# Altium PCB PCB1.PcbDoc
Units mm, origin at the board's own origin, x right, y up, seen from the top; angles counter-clockwise.
Board outline 42.8 x 28.96 mm, 2 copper layers (Top Layer, Bottom Layer); 61 components, 68 nets, 230 pads, 35 vias.
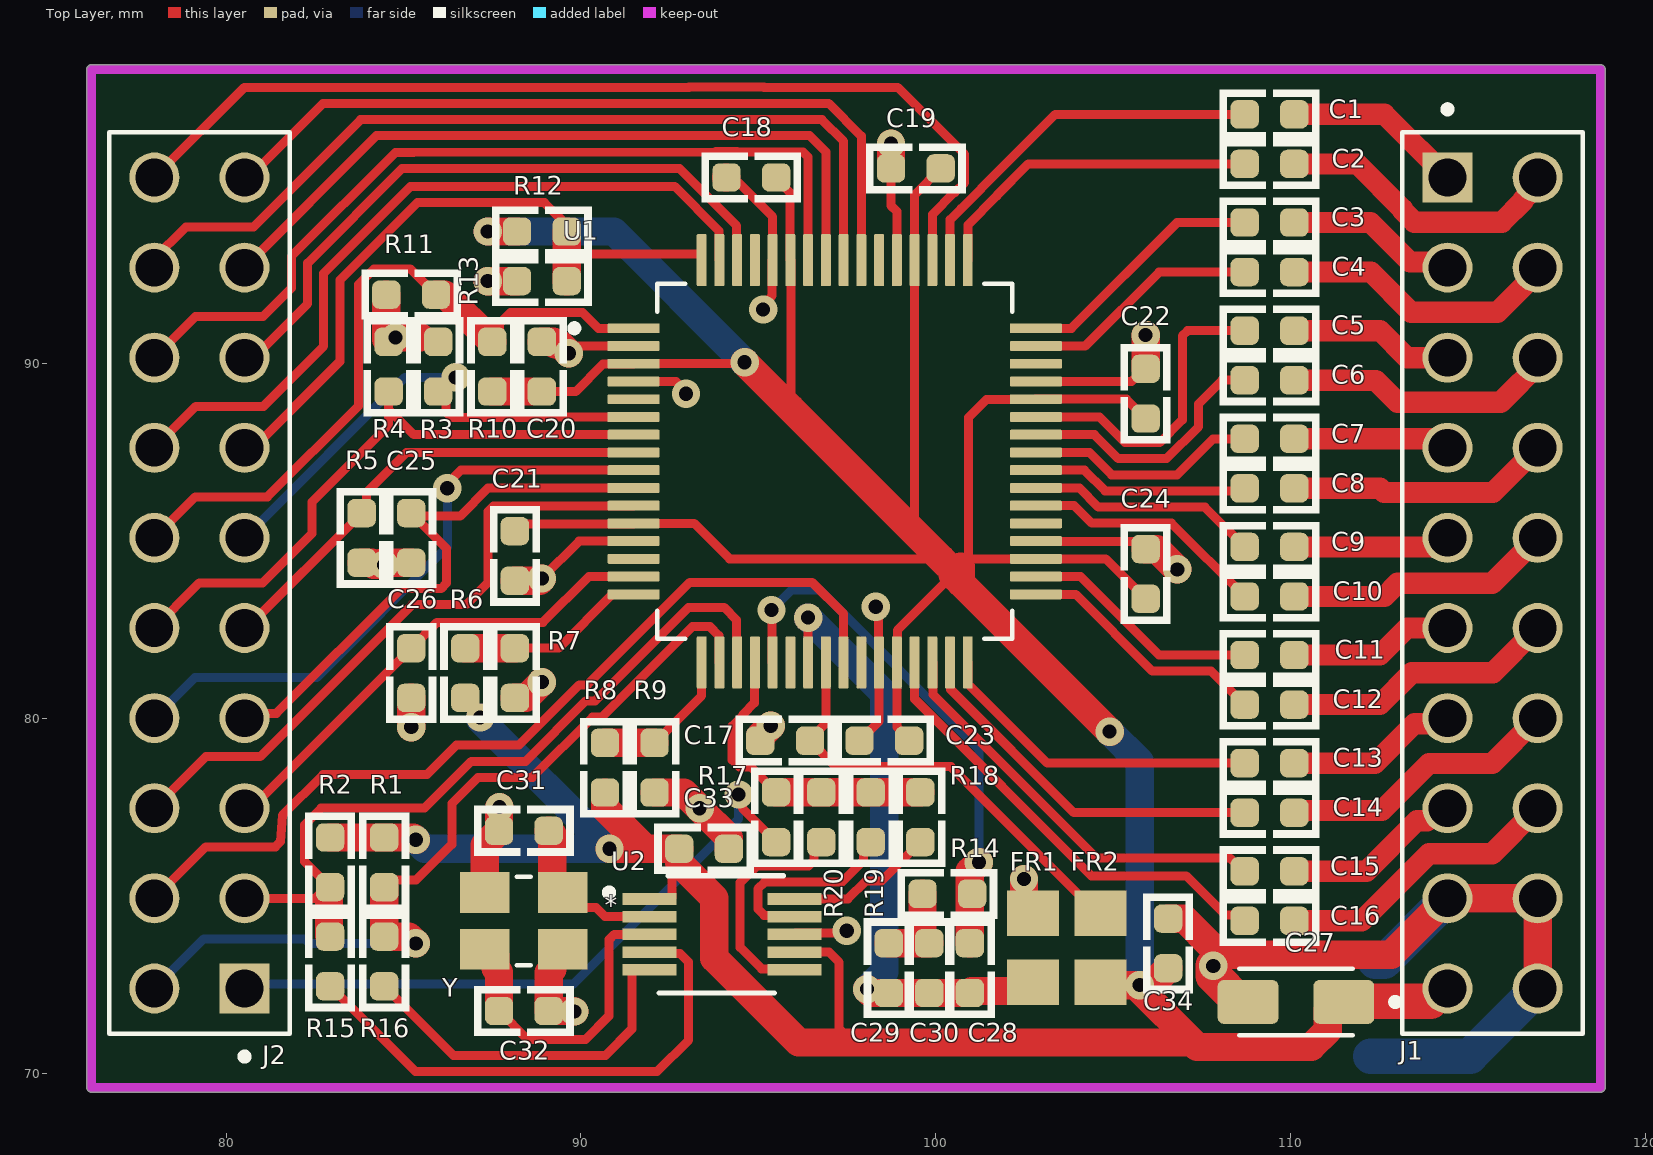
[diagram p0: Top Layer view]
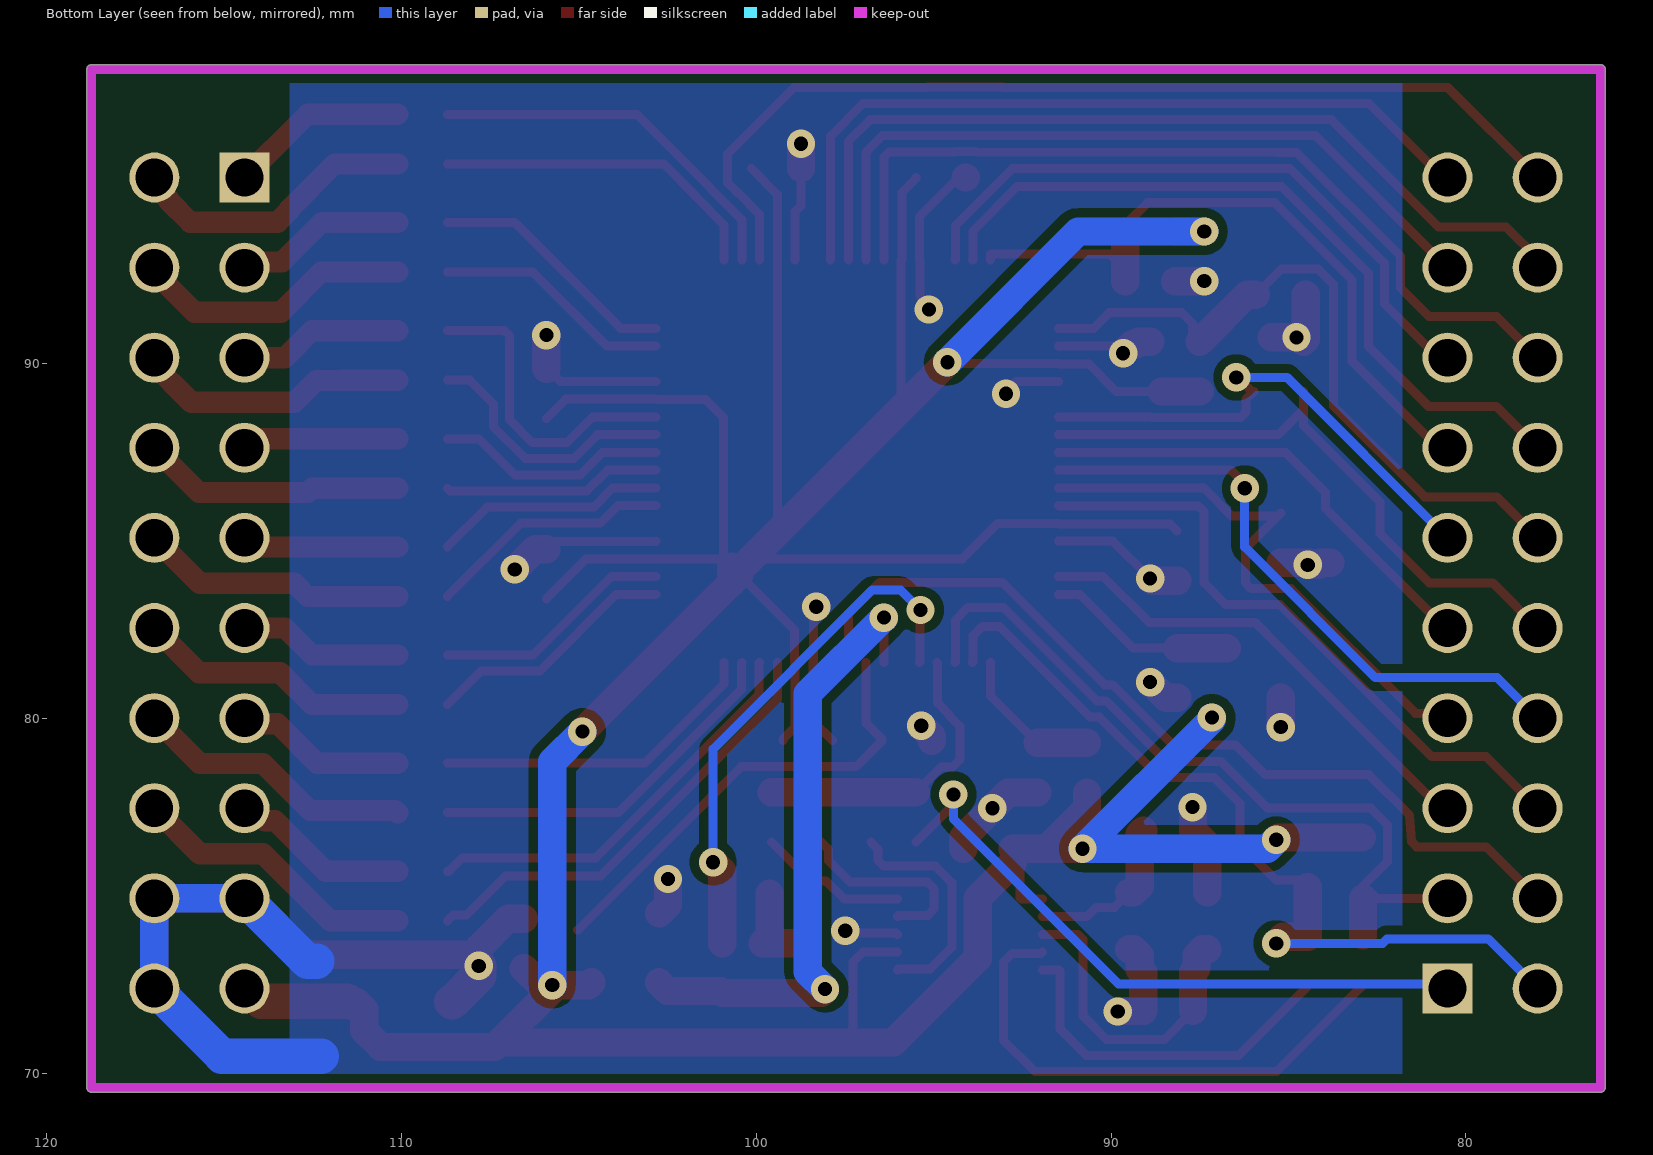
[diagram p1: Bottom Layer view, seen from below]
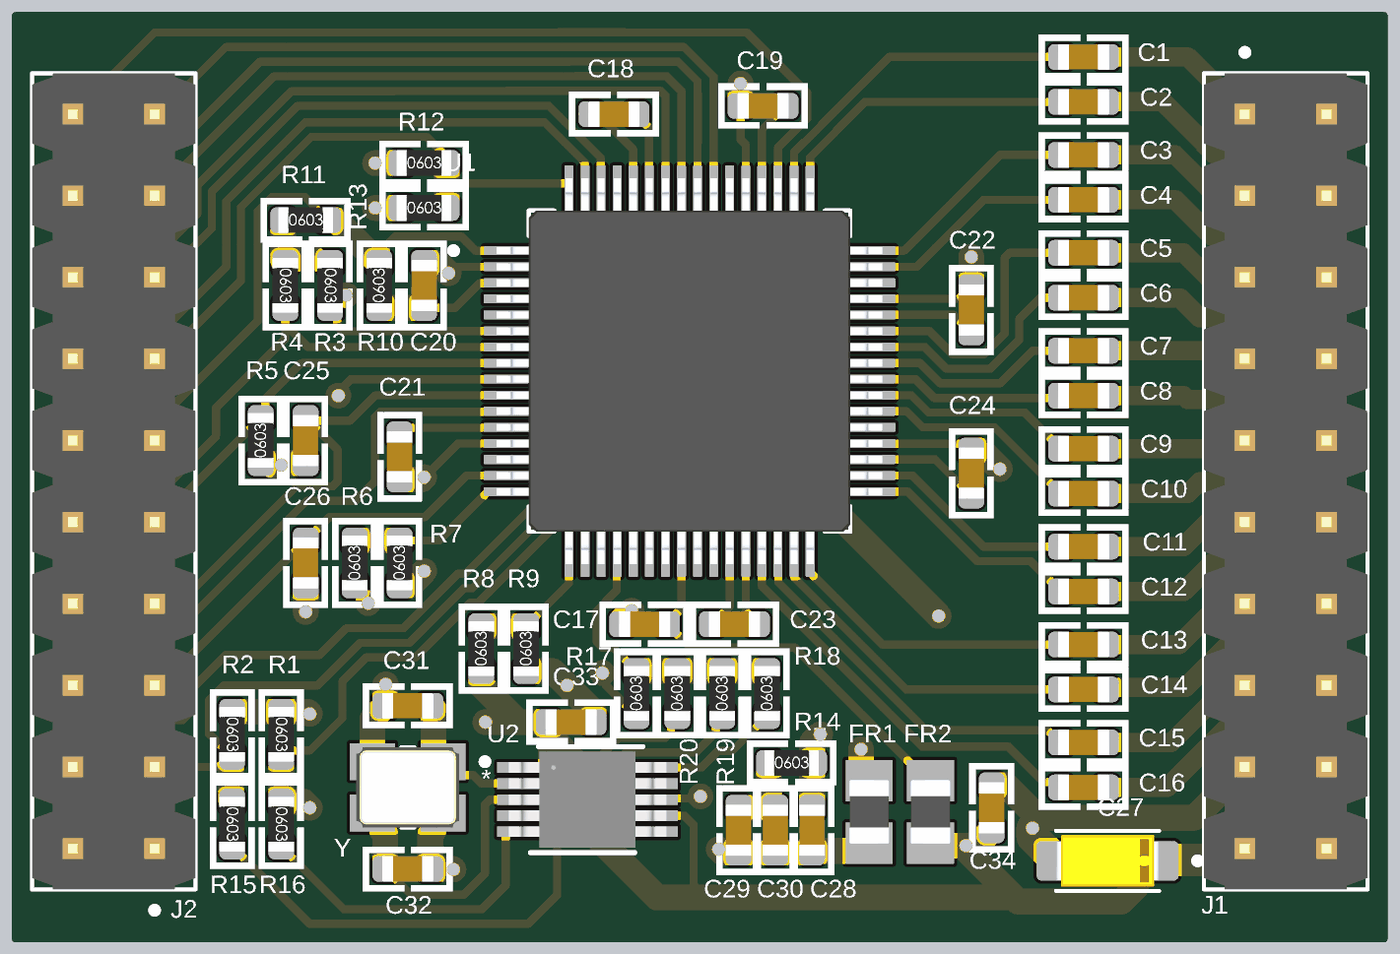
[diagram p2: 3D render of the assembled board from above, using the file's embedded part models]

## Layer stack, top to bottom
Top Solder: solder mask 0.0102, Solder Resist, Dk 3.5
Top Layer: signal copper 0.0356
Dielectric 1: dielectric 0.32, FR-4, Dk 4.8
Bottom Layer: signal copper 0.0356
Bottom Solder: solder mask 0.0102, Solder Resist, Dk 3.5

## Board outline
76.073,69.596 ccw(c76.2,69.596) 76.2,69.469 118.745,69.469 ccw(c118.745,69.596) 118.872,69.596 118.872,98.298 ccw(c118.745,98.298) 118.745,98.425 76.2,98.425 ccw(c76.2,98.298) 76.073,98.298

## Design rules (kind name [scope] priority, off if disabled: settings)
Clearance [All] p1: gap=0.254 ignorepadtopadclearanceinfootprint=FALSE except(0: Arc-Hole Track-Hole SMDPad-Hole THPad-Hole Via-Hole Fill-Hole Poly-Hole Region-Hole Text-Hole; 0.15: Arc-SMDPad Track-SMDPad SMDPad-SMDPad; 0.2: Arc-Arc Arc-Track Track-Track)
PolygonConnect [All] p1: connectstyle=Relief reliefconductorwidth=0.254 reliefentries=4 polygonreliefangle="90 Angle" airgapwidth=0.254
RoutingVias [All] p1: holewidth=0.711 width=1.27 viastyle="Through Hole" minholewidth=0.711 minwidth=1.27 maxholewidth=0.711 maxwidth=1.27
SolderMaskExpansion [All] p1: expansion=0.102 istentingtop=FALSE
Width [All] p1: maxlimit=1 minlimit=0.254 preferedwidth=0.6
30 further rules are at their usual default settings.

## Components (designator, comment, footprint, x,y, rotation, side; value= is the part's Value field where it differs from the comment)
C1 "100nF" C0603 109.409,97.028 r0 top
C2 "100nF" C0603 109.409,95.631 r0 top
C3 "100nF" C0603 109.409,93.98 r0 top
C4 "100nF" C0603 109.409,92.583 r0 top
C5 "100nF" C0603 109.409,90.932 r0 top
C6 "100nF" C0603 109.409,89.535 r0 top
C7 "100nF" C0603 109.409,87.884 r0 top
C8 "100nF" C0603 109.409,86.487 r0 top
C9 "100nF" C0603 109.409,84.836 r0 top
C10 "100nF" C0603 109.409,83.439 r0 top
C11 "100nF" C0603 109.409,81.788 r0 top
C12 "100nF" C0603 109.409,80.391 r0 top
C13 "100nF" C0603 109.409,78.74 r0 top
C14 "100nF" C0603 109.409,77.343 r0 top
C15 "100nF" C0603 109.409,75.692 r0 top
C16 "100nF" C0603 109.409,74.295 r0 top
C17 "100nF" C0603 95.758,79.375 r0 top
C18 "100nF" C0603 94.804,95.25 r0 top
C19 "100nF" C0603 99.441,95.504 r0 top
C20 "100nF" C0603 88.9,89.916 r270 top
C21 "100nF" C0603 88.138,84.582 r90 top
C22 "100nF" C0603 105.918,89.154 r270 top
C23 "100nF" C0603 98.552,79.375 r0 top
C24 "100nF" C0603 105.918,84.074 r270 top
C25 "47pF" C0603 85.217,85.09 r270 top
C26 "1nF" C0603 85.217,81.28 r270 top
C27 "2.2uF" CAPMP3216X180N 110.156,72.009 r180 top
C28 "100nF" C0603 100.965,72.963 r270 top
C29 "100nF" C0603 98.679,72.963 r270 top
C30 "100nF" C0603 99.822,72.963 r270 top
C31 "12pF" C0603 88.392,76.835 r180 top
C32 "12pF" C0603 88.392,71.755 r0 top
C33 "470nF" C0603 93.472,76.327 r180 top
C34 "470nF" C0603 106.553,73.66 r270 top
FR1 "MI0805K400R-10" FB_MI0805K400R-10 102.743,73.533 r270 top
FR2 "MI0805K400R-10" FB_MI0805K400R-10 104.648,73.533 r90 top
J1 "VMHD-2x10-150-095-030" VALCON_VMHD-2x10-150-095-030 115.697,83.82 r270 top
J2 "VMHD-2x10-150-095-030" VALCON_VMHD-2x10-150-095-030 79.248,83.82 r90 top
R1 "4.7K" R0603 84.455,75.946 r270 top
R2 "4.7K" R0603 82.931,75.946 r270 top
R3 "0R" R0603 85.979,89.916 r270 top
R4 "0R" R0603 84.582,89.916 r270 top
R5 "0R" R0603 83.82,85.09 r90 top
R6 "0R" R0603 86.741,81.28 r90 top
R7 "0R" R0603 88.138,81.28 r90 top
R8 "0R" R0603 90.678,78.613 r90 top
R9 "0R" R0603 92.075,78.613 r90 top
R10 "0R" R0603 87.503,89.916 r90 top
R11 "0R" R0603 85.217,91.948 r0 top
R12 "0R" R0603 88.9,93.726 r0 top
R13 "0R" R0603 88.9,92.329 r0 top
R14 "3.4K" R0603 100.33,75.057 r0 top
R15 "0R" R0603 82.931,73.152 r270 top
R16 "0R" R0603 84.455,73.152 r270 top
R17 "0R" R0603 95.504,77.216 r90 top
R18 "0R" R0603 99.568,77.216 r90 top
R19 "0R" R0603 98.171,77.216 r90 top
R20 "0R" R0603 96.774,77.216 r90 top
U1 "sta309a" QFP50P1200X1200X120-64N 97.155,87.249 r0 top
U2 "SI5351A-B-GT" 10MSOP_3X3_SIL 93.98,73.914 r0 top
Y "X322527MOB4SI" XTAL_TSX-3225_16.0000MF18X-AC3 88.392,74.295 r180 top

## Footprints (in the part's own frame and the unit in brackets; to place one, negate y for a bottom-side part, rotate by r counter-clockwise, add the part's x,y. Pads: shape width x height; smd on the part's side, far side on the other; paste and mask are expansions set on the pad)
10MSOP_3X3_SIL [mil]
  rect 60x13 smd paste+0: 1(-80.5,39.37) 2(-80.5,19.68) 3(-80.5,0) 4(-80.5,-19.68) 5(-80.5,-39.37) 6(80.5,-39.37) 7(80.5,-19.68) 8(80.5,0) 9(80.5,19.68) 10(80.5,39.37)
  silkscreen extent -70,-65 68,65, body extent -96,-59 96,59, height 43
C0603 [mm]
  rrect50% 0.8x0.8 smd mask+0.075: 1(-0.7,0) 2(0.7,0)
  silkscreen extent -1.4,-0.7 1.4,0.7, body extent -0.8,-0.4 0.8,0.4, height 0.9
CAPMP3216X180N [mm]
  rrect25% 1.71x1.23 smd: 1(-1.35,0) 2(1.35,0)
  silkscreen extent -2.9,-0.93 1.6,0.93, body extent -1.6,-0.8 1.6,0.8, height 1.8
FB_MI0805K400R-10 [mm]
  rect 1.285x1.47 smd: 1(-0.973,0) 2(0.973,0)
  body extent -1,-0.63 1,0.63, height 1.1
QFP50P1200X1200X120-64N [mm]
  rrect25% 1.47x0.28 smd: 1(-5.67,3.75) 2(-5.67,3.25) 3(-5.67,2.75) 4(-5.67,2.25) 5(-5.67,1.75) 6(-5.67,1.25) 7(-5.67,0.75) 8(-5.67,0.25) 9(-5.67,-0.25) 10(-5.67,-0.75) 11(-5.67,-1.25) 12(-5.67,-1.75) 13(-5.67,-2.25) 14(-5.67,-2.75) 15(-5.67,-3.25) 16(-5.67,-3.75) 33(5.67,-3.75) 34(5.67,-3.25) 35(5.67,-2.75) 36(5.67,-2.25) 37(5.67,-1.75) 38(5.67,-1.25) 39(5.67,-0.75) 40(5.67,-0.25) 41(5.67,0.25) 42(5.67,0.75) 43(5.67,1.25) 44(5.67,1.75) 45(5.67,2.25) 46(5.67,2.75) 47(5.67,3.25) 48(5.67,3.75)
  rrect25% 0.28x1.47 smd: 17(-3.75,-5.67) 18(-3.25,-5.67) 19(-2.75,-5.67) 20(-2.25,-5.67) 21(-1.75,-5.67) 22(-1.25,-5.67) 23(-0.75,-5.67) 24(-0.25,-5.67) 25(0.25,-5.67) 26(0.75,-5.67) 27(1.25,-5.67) 28(1.75,-5.67) 29(2.25,-5.67) 30(2.75,-5.67) 31(3.25,-5.67) 32(3.75,-5.67) 49(3.75,5.67) 50(3.25,5.67) 51(2.75,5.67) 52(2.25,5.67) 53(1.75,5.67) 54(1.25,5.67) 55(0.75,5.67) 56(0.25,5.67) 57(-0.25,5.67) 58(-0.75,5.67) 59(-1.25,5.67) 60(-1.75,5.67) 61(-2.25,5.67) 62(-2.75,5.67) 63(-3.25,5.67) 64(-3.75,5.67)
  silkscreen extent -7.44,-5 5,5, body extent -6,-6 6,6, height 1.19
R0603 [mm]
  rrect50% 0.8x0.8 smd mask+0.075: 1(-0.7,0) 2(0.7,0)
  silkscreen extent -1.4,-0.7 1.4,0.7, body extent -0.85,-0.4 0.85,0.4, height 0.56
VALCON_VMHD-2x10-150-095-030 [mm]
  rect 1.41x1.41 hole 1.06: 01(-11.43,-1.27)
  round 1.41 hole 1.06: 02(-11.43,1.27) 03(-8.89,-1.27) 04(-8.89,1.27) 05(-6.35,-1.27) 06(-6.35,1.27) 07(-3.81,-1.27) 08(-3.81,1.27) 09(-1.27,-1.27) 10(-1.27,1.27) 11(1.27,-1.27) 12(1.27,1.27) 13(3.81,-1.27) 14(3.81,1.27) 15(6.35,-1.27) 16(6.35,1.27) 17(8.89,-1.27) 18(8.89,1.27) 19(11.43,-1.27) 20(11.43,1.27)
  silkscreen extent -13.45,-2.54 12.7,2.54, body extent -12.7,-2.54 12.7,2.54, height 12
XTAL_TSX-3225_16.0000MF18X-AC3 [mm]
  rect 1.4x1.15 smd: 1(-1.1,-0.8) 2(1.1,-0.8) 3(1.1,0.8) 4(-1.1,0.8)
  silkscreen extent -2.5,-1.25 0.2,1.25, body extent -1.6,-1.25 1.6,1.25, height 0.6

## Part data
C1 C2 C3 C4 C5 C6 C7 C8 C9 C10 C11 C12 C13 C14 C15 C16 C17 C18 C19 C20 C21 C22 C23 C24 C25 C26 C28 C29 C30 C31 C32 C33 C34: library part CAP_SMD_MLCC_0603_1, "CAP, MLCC", ASSEMBLY=ASSEMBLY, MANF=-, MANF_P#=MANF_PART#, PARAM="-, -%", PARAM2=-V, Price="100= 1$"
C27: library part T491A475K010AT, "Capacitors Tantalum PCB 4.7uF SMD Tol 10% 10 VDC Case Size 3216 T491 Series", Package="SMD-2 KEMET", Check_prices=https://www.snapeda.com/parts/T491A475K010AT/KEMET/view-part/?ref=eda, MF=KEMET, MP=T491A475K010AT, SnapEDA_Link=https://www.snapeda.com/parts/T491A475K010AT/KEMET/view-part/?ref=snap
FR1 FR2: "40 Ohms @ 100MHz 1 Power Line Ferrite Bead 0805 (2012 Metric) 1.5A 50mOhm", Package="0805 Laird-Signal Integrity Products", Availability=Warning, Check_prices=https://www.snapeda.com/parts/MI0805K400R-10/Laird/view-part/4794545/?ref=eda, MF="Laird-Signal Integrity Products", MP=MI0805K400R-10, Price=None, Purchase-URL=https://pricing.snapeda.com/search/part/MI0805K400R-10/?ref=eda, SnapEDA_Link=https://www.snapeda.com/parts/MI0805K400R-10/Laird/view-part/4794545/?ref=snap
J1 J2: Package=None, Availability=Unavailable, MP=VMHD-2x10-150-095-030, Price=None
R1 R2 R3 R4 R5 R6 R7 R8 R9 R10 R11 R12 R13 R14 R15 R16 R17 R18 R19 R20: library part RES_SMD_0603_1, "RESISTOR, SMD", ASSEMBLY=ASSEMBLY, DESC=DESCRIPTION, DIST#=MOUSER, MANF=-, MANF_P#=-, PARAM="1%, 0.1W", PARAM2=-, Price=-
U2: "No Description Available", Manufacturer_Name="Silicon Labs", Copyright="Copyright (C) 2025 Ultra Librarian. All rights reserved.", Manufacturer_Part_Number=SI5351A-B-GT, RefDes=RefDes, Type=Type
Y: library part TSX-3225_16.0000MF18X-AC3, "16 MHz Â±10ppm Crystal 18pF 60 Ohms 4-SMD, No Lead", Package="SMD-4 EPSON", Check_prices=https://www.snapeda.com/parts/TSX-3225%2016.0000MF18X-AC3/EPSON/view-part/?ref=eda, MF=EPSON, MP="TSX-3225 16.0000MF18X-AC3", SnapEDA_Link=https://www.snapeda.com/parts/TSX-3225%2016.0000MF18X-AC3/EPSON/view-part/?ref=snap

## Via types
v1: diameter 0.8, hole 0.4, Top Layer to Bottom Layer, tented both sides, 35 vias

## Nets (pads, with @x,y where several pads share a name; then routed paths per layer and width w, separated by ;. In a path a pad name is that pad's centre, name@x,y a point inside that pad or via, vN(x,y) a via of type N, cw(c..) or ccw(c..) an arc to the next point about the centre after c; other vN are vias at no path point)
+3.3: C18.2 C19.2 C20.2 C21.2 C22.2 C23.2 C24.2 C27.1 C33.2 C34.2 FR2.1 J1.19 R1.1 R2.1 R6.1 R8.1 R10.1 R12.1 U1.3 U1.12 U1.28 U1.35 U1.44 U1.52 U1.59 U2.1 U2.7 | length 143.6
  Top Layer w0.254: C21.2 88.342,85.486 91.472,85.486 U1.12 93.19,85.499 94.19,84.499 100.159,84.499 ; C20.2@88.581,89.216 C20.2 89.851,89.216 90.621,89.986 91.472,89.986 U1.3 91.498,90.012 94.584,90.012 v1(94.615,90.043) ; U2.1 92.532,74.914 92.57,74.952 C33.2@92.57,76.125 ; C18.2 95.504,95.216 95.892,94.828 95.892,92.932 U1.59 95.918,92.906 95.918,88.74 ; U2.7 96.995,73.414 97.015,73.394 ; 97.016,73.394 97.282,73.128 97.282,71.247 97.663,70.866 ; C23.2 99.252,79.415 98.905,79.762 U1.28 98.918,81.592 98.918,82.485 100.482,84.049 100.545,84.113 100.694,84.262 ; 99.405,85.344 U1.52 99.405,94.768 C19.2 ; 100.711,84.279 100.931,84.499 ; C24.2 104.793,84.499 U1.35 100.931,84.499 ; C22.2 105.373,88.999 U1.44 102.812,88.986 101.432,88.986 100.931,88.485 100.931,84.499
  Top Layer w0.8: R2.1 R1.1 85.279,76.646 v1(85.344,76.581) ; v1(87.376,93.726) R12.1 ; R10.1 C20.2@88.581,89.216 ; R8.1 90.678,77.47 91.821,76.327 ; v1(90.805,76.327) 91.821,76.327 ; C33.2@92.772,75.929 93.761,74.94 93.761,73.246 96.141,70.866 97.663,70.866 107.25,70.866 ; C33.2 91.821,76.327 ; v1(94.615,90.043) 95.918,88.74 100.159,84.499 100.545,84.113 100.711,83.947 ; 100.482,84.049 100.711,83.82 ; 100.711,84.279 100.711,83.947 ; FR2.1 104.723,72.485 v1(105.752,72.485) ; v1(104.902,79.629) 100.711,83.82 ; C34.2 106.078,72.485 v1(105.752,72.485) ; C27.1 111.266,72.009 111.051,71.794 111.051,71.208 110.582,70.739 107.377,70.739 107.25,70.866 ; 100.711,83.82 100.711,83.947 ; v1(105.752,72.485) 105.752,72.364 107.25,70.866
  Top Layer w1: C27.1 111.532,72.035 113.961,72.035 114.316,72.39 J1.19
  Bottom Layer w0.8: v1(85.344,76.581) 85.598,76.327 v1(90.805,76.327) 87.159,79.973 v1(87.159,80.029) ; v1(87.376,93.726) 90.932,93.726 v1(94.615,90.043) ; v1(104.902,79.629) 105.752,78.779 v1(105.752,72.485)
\lrcko: J2.18 U1.56 | length 24.7
  Top Layer w0.254: J2.18@77.938,92.924 78.867,93.853 80.765,93.853 83.794,96.882 93.424,96.882 93.427,96.885 94.781,96.885 94.784,96.882 96.793,96.882 97.405,96.27 97.405,95.9 97.408,95.897 97.408,94.349 97.405,94.346 U1.56
bicki: J2.06 U1.11 | length 18.2
  Top Layer w0.254: J2.06 79.432,78.924 80.956,78.924 85.241,83.209 86.765,83.209 87.376,83.82 87.376,85.83 87.532,85.986 91.472,85.986 U1.11
bicko: J2.19 U1.55 | length 22.5
  Top Layer w0.254: J2.19@80.262,94.867 82.731,97.336 93.236,97.336 93.239,97.339 94.969,97.339 94.972,97.336 96.981,97.336 97.905,96.412 U1.55
bypass: R6.2 R7.2 U1.16 | length 5.4
  Top Layer w0.254: R7.2 89.371,81.98 90.89,83.499 U1.16
  Top Layer w0.8: R6.2 R7.2
ckout: J2.04 U1.25 | length 25.2
  Top Layer w0.254: J2.04 79.432,76.384 81.385,76.384 81.534,76.533 81.585,77.267 82.737,78.419 85.658,78.419 86.487,79.248 88.254,79.248 89.954,80.948 90.18,80.948 93.071,83.839 96.514,83.839 97.405,82.948 U1.25
eapd: J2.20 U1.51 | length 28
  Top Layer w0.254: J2.20 80.518,97.79 93.048,97.79 93.051,97.793 95.157,97.793 95.16,97.79 98.93,97.79 100.818,95.902 100.818,95.106 100.539,94.827 100.528,94.827 99.905,94.204 U1.51
filter: C28.1 R14.2 U1.21 | length 15
  Top Layer w0.254: v1(95.373,83.058) 95.392,83.039 95.392,81.592 U1.21
  Top Layer w0.8: C28.1 100.965,75.692 v1(101.219,75.946)
  Bottom Layer w0.254: v1(95.373,83.058) 95.94,83.625 96.728,83.625 101.219,79.134 v1(101.219,75.946)
gnd: C17.1 C18.1 C19.1 C20.1 C21.1 C22.1 C23.1 C24.1 C25.2 C26.2 C27.2 C31.2 C32.2 C33.1 C34.1 FR1.1 J1.17 J1.18 J1.20 R3.1 R4.1 R5.1 R7.1 R9.1 R11.1 R13.1 U1.2 U1.4 U1.13 U1.27 U1.36 U1.45 U1.53 U1.60 U2.8 Y.2 Y.4 | length 74.6
  Top Layer w0.254: v1(88.9,83.947) 89.952,84.999 U1.13 ; v1@89.504,90.499 U1.2 U1.2@91.472,90.486 ; U1.4 92.679,89.499 92.964,89.214 v1(92.964,89.154) ; C18.1@94.423,95.123 95.405,94.141 U1.60 95.392,92.906 95.392,91.919 95.137,91.664 v1(95.137,91.527) ; U2.8 96.063,73.952 97.432,73.952 v1(97.494,74.015) ; C23.1 98.405,79.928 U1.27 98.392,81.592 98.392,83.068 v1(98.309,83.151) ; C19.1 98.741,94.457 98.905,94.293 U1.53 ; U1.36 102.838,84.986 105.706,84.986 C24.1 ; U1.45 105.523,89.499 105.878,89.854 C22.1
  Top Layer w0.8: R5.1 84.101,84.39 84.163,84.328 v1(84.455,84.328) ; v1@84.393,84.39 C25.2 ; R11.1 84.517,90.681 R4.1 ; v1(84.772,90.743) 85.471,90.743 ; v1(85.217,79.756) C26.2 ; Y.2 87.292,76.435 C31.2 87.692,77.488 v1(87.705,77.502) ; v1(87.376,92.329) R13.1 ; R7.1 88.454,80.58 v1(88.9,81.026) ; C21.1 88.835,83.882 v1(88.9,83.947) ; C20.1 89.216,90.616 89.281,90.551 89.408,90.551 v1(89.662,90.297) ; Y.4 89.367,73.495 89.192,73.32 89.192,72.936 89.092,72.836 C32.2 89.795,71.755 v1(89.811,71.739) ; R9.1 92.902,77.913 v1(93.345,77.47) 93.345,77.466 94.172,76.639 C33.1 ; C18.1@94.101,95.247 C18.1 ; C17.1 95.058,79.501 v1(95.351,79.794) ; C19.1 v1(98.741,96.201) ; v1(102.489,75.476) 102.489,74.748 102.731,74.506 FR1.1 ; C24.1 106.234,84.774 v1(106.807,84.201) ; C22.1 v1(105.918,90.805) ; C34.1 106.996,74.36 107.823,73.533 ; v1(107.823,73.025) 108.143,73.345 112.842,73.345 J1.17 J1.18 J1.20
  Top Layer w1: v1(107.823,73.025) 107.823,72.752 108.566,72.009 C27.2@108.585,72.009
  Bottom Layer w0.8: J1.17 J1.18 J1.20
  Bottom Layer w1: 112.268,70.485 115.062,70.485 J1.20 ; 112.395,73.152 112.649,73.152 J1.17
gnda: C28.2 C29.2 C30.2 FR1.2 U1.23 | length 17.8
  Top Layer w0.254: U1.23 v1(96.405,82.844)
  Top Layer w0.8: v1(98.063,72.371) 98.171,72.263 C29.2 C30.2 C28.2 101.02,72.318 102.501,72.318 FR1.2
  Bottom Layer w0.254: v1(98.063,72.371) v1@98.063,72.519
  Bottom Layer w0.8: v1(96.405,82.844) 98.548,80.7 98.548,72.856 v1(98.063,72.371)
lrcki: C25.1 J2.07 U1.10 | length 16.2
  Top Layer w0.254: J2.07 80.651,80.143 81.413,80.143 84.933,83.663 86.061,83.663 86.21,83.812 86.21,84.797 C25.1@85.301,85.706 ; C25.1 C25.1@85.301,85.706 ; U1.10 87.388,86.499 86.595,85.706 C25.1@85.301,85.706
mvo: J2.12 R10.2 R11.2 U1.1 | length 20.3
  Top Layer w0.254: J2.12@77.795,84.907 79.134,86.246 81.166,86.246 83.725,88.805 83.725,92.231 84.169,92.675 85.19,92.675 85.723,92.142 R11.2@85.817,92.142 ; R10.2 87.702,90.815 87.702,91.131 88.011,91.44 90.05,91.44 90.491,90.999 U1.1
  Top Layer w0.8: R11.2 86.171,91.948 R10.2
NetC29_1: C29.1 C30.1 R14.1 | length 2.6
  Top Layer w0.8: C29.1 C30.1 99.63,73.855 R14.1
NetC31_1: C31.1 U2.2 Y.1 | length 4.7
  Top Layer w0.254: Y.1 89.911,74.676 90.424,74.676 90.686,74.414 U2.2
  Top Layer w0.8: C31.1 89.192,76.735 89.192,75.27 89.367,75.095 Y.1
NetC32_1: C32.1 U2.3 Y.3 | length 9
  Top Layer w0.254: C32.1 88.489,70.958 90.135,70.958 90.792,71.615 90.792,73.765 90.941,73.914 U2.3
  Top Layer w0.8: Y.3 87.417,73.495 87.592,73.32 87.592,72.951 87.692,72.851 C32.1
NetR15_2: R15.2 U2.4 | length 14.9
  Top Layer w0.254: R15.2 85.333,70.05 92.148,70.05 93.034,70.936 93.034,73.134 92.792,73.376 91.973,73.376 U2.4
NetR16_2: R16.2 U2.5 | length 10.2
  Top Layer w0.254: R16.2@84.486,72.421 86.403,70.504 90.697,70.504 91.44,71.247 91.44,72.876 91.478,72.914 U2.5
NetR18_1: R18.1 U2.10 | length 4.2
  Top Layer w0.254: U2.10 97.527,74.914 98.039,75.426 98.478,75.426 R18.1
NetR19_1: R19.1 U2.9 | length 5.6
  Top Layer w0.254: U2.9 95.987,74.452 95.168,74.452 94.986,74.634 94.986,75.194 95.177,75.385 97.356,75.385 97.972,76.001 97.972,76.317 R19.1
NetR20_1: R20.1 U2.6 | length 6.6
  Top Layer w0.254: U2.6 95.998,72.941 95.094,72.941 94.488,73.547 94.488,75.373 94.954,75.839 96.413,75.839 96.575,76.001 96.575,76.317 R20.1
out1a: C1.1 U1.50 | length 10.7
  Top Layer w0.254: U1.50 100.405,94.062 100.716,94.373 100.727,94.373 101.272,94.918 101.272,94.929 103.371,97.028 C1.1
out1a1: C1.2 J1.01 | length 5.3
  Top Layer w0.6: C1.2 112.649,97.028 J1.01@114.593,95.084
out1b: C2.1 U1.49 | length 9.5
  Top Layer w0.254: U1.49 100.905,93.909 101.726,94.73 101.726,94.741 102.616,95.631 C2.1
out1b1: C2.2 J1.02 | length 8.4
  Top Layer w0.6: C2.2 111.887,95.631 113.168,94.35 113.168,94.316 113.493,93.991 115.962,93.991 116.562,94.591 116.562,94.626 117.21,95.274 J1.02@117.245,95.274
out2a: C3.1 U1.48 | length 7.1
  Top Layer w0.254: U1.48 103.826,90.999 106.807,93.98 C3.1
out2a1: C3.2 J1.03 | length 4.8
  Top Layer w0.6: C3.2 112.256,93.98 113.371,92.865 114.272,92.865 J1.03
out2b: C4.1 U1.47 | length 6.7
  Top Layer w0.254: U1.47 104.215,90.499 106.299,92.583 C4.1
out2b1: C4.2 J1.04 | length 7.9
  Top Layer w0.6: C4.2 112.268,92.583 113.4,91.451 115.835,91.451 J1.04@117.017,92.633
out3a: C5.1 U1.43 | length 8.9
  Top Layer w0.254: U1.43 104.616,88.499 105.338,87.777 106.316,87.777 106.956,88.417 106.956,90.783 107.105,90.932 C5.1
out3a1: C5.2 J1.05 | length 4.6
  Top Layer w0.6: C5.2 112.522,90.932 113.284,90.17 J1.05
out3b: C6.1 U1.42 | length 7.5
  Top Layer w0.254: U1.42 104.474,87.999 105.15,87.323 106.504,87.323 107.41,88.229 107.41,88.868 108.077,89.535 C6.1
out3b1: C6.2 J1.06 | length 7.7
  Top Layer w0.6: C6.2 111.682,89.535 111.692,89.525 112.405,89.525 113.019,88.911 115.927,88.911 J1.06@117.075,90.059
out4a: C7.1 U1.41 | length 6.6
  Top Layer w0.254: U1.41 104.332,87.499 104.962,86.869 106.808,86.869 107.823,87.884 C7.1
out4a1: C7.2 J1.07 | length 4.4
  Top Layer w0.6: C7.2 113.954,87.884 114.208,87.63 J1.07
out4b: C8.1 U1.40 | length 6.2
  Top Layer w0.254: U1.40 104.19,86.999 104.774,86.415 108.637,86.415 C8.1
out4b1: C8.2 J1.08 | length 7.8
  Top Layer w0.6: C8.2 112.522,86.487 112.638,86.371 115.708,86.371 J1.08@117.204,87.867
out5a: C9.1 U1.39 | length 6.6
  Top Layer w0.254: U1.39 104.048,86.499 104.588,85.959 107.586,85.959 C9.1
out5a1: C9.2 J1.09 | length 4.4
  Top Layer w0.6: C9.2 113.954,84.836 114.208,85.09 J1.09
out5b: C10.1 U1.38 | length 6.9
  Top Layer w0.254: U1.38 103.906,85.999 104.4,85.505 106.643,85.505 C10.1
out5b1: C10.2 J1.10 | length 7.9
  Top Layer w0.6: C10.2 112.649,83.439 113.019,83.809 115.686,83.809 J1.10@117.237,85.36
out6a: C11.1 U1.34 | length 6.8
  Top Layer w0.254: U1.34 104.088,83.999 106.299,81.788 C11.1
out6a1: C11.2 J1.11 | length 4.6
  Top Layer w0.6: C11.2 112.522,81.788 113.284,82.55 J1.11
out6b: C12.1 U1.33 | length 7.2
  Top Layer w0.254: U1.33 103.946,83.499 106.111,81.334 107.766,81.334 C12.1
out6b1: C12.2 J1.12 | length 7.8
  Top Layer w0.6: C12.2 112.522,80.391 113.422,81.291 115.708,81.291 J1.12
out7a: C13.1 U1.32 | length 9.3
  Top Layer w0.254: U1.32 100.918,81.566 100.918,80.971 103.149,78.74 C13.1
out7a1: C13.2 J1.13 | length 4.8
  Top Layer w0.6: C13.2 112.383,78.74 113.498,79.855 114.272,79.855 J1.13
out7b: C14.1 U1.31 | length 10.5
  Top Layer w0.254: U1.31 100.418,81.566 100.418,80.82 103.895,77.343 C14.1
out7b1: C14.2 J1.14 | length 8
  Top Layer w0.6: C14.2 110.172,77.406 112.583,77.406 113.906,78.729 115.686,78.729 J1.14
out8a: C15.1 U1.30 | length 11.8
  Top Layer w0.254: U1.30 99.918,81.566 99.918,80.678 104.523,76.073 108.288,76.073 108.669,75.692 C15.1
out8a1: C15.2 J1.15 | length 5.1
  Top Layer w0.6: C15.2 112.141,75.692 113.57,77.121 113.859,77.121 114.208,77.47 J1.15
out8b: C16.1 U1.29 | length 12.9
  Top Layer w0.254: U1.29 99.405,80.549 104.389,75.565 107.061,75.565 108.163,74.463 108.541,74.463 C16.1
out8b1: C16.2 J1.16 | length 8.2
  Top Layer w0.6: C16.2 112.012,74.295 112.959,75.242 113.906,76.189 115.686,76.189 J1.16
pwdn: J2.13 R12.2 R13.2 U1.64 | length 19.2
  Top Layer w0.254: J2.13@80.68,87.538 83.204,90.062 83.204,92.355 85.391,94.542 88.973,94.542 R12.2@89.535,93.98 ; R13.2 89.797,92.526 89.797,92.845 90.043,93.091 93.392,93.091 93.405,93.078 U1.64
  Top Layer w0.8: R13.2 89.6,92.845 R12.2
reset: C26.1 J2.05 U1.15 | length 13.5
  Top Layer w0.254: J2.05@80.707,77.47 C26.1 85.944,82.707 88.93,82.707 90.222,83.999 U1.15
sa: R8.2 R9.2 U1.17 | length 4.2
  Top Layer w0.254: R9.2 93.405,80.643 U1.17
  Top Layer w0.8: R8.2 R9.2
scl: J2.03 R2.2 R15.1 U1.19 | length 21.7
  Top Layer w0.254: J2.03 82.509,74.93 82.597,75.018 82.703,75.018 R2.2 82.204,75.973 82.204,76.994 82.68,77.47 85.591,77.47 86.915,78.794 88.442,78.794 90.142,80.494 90.4,80.494 93.037,83.131 94.034,83.131 94.392,82.773 94.392,81.592 U1.19
  Top Layer w0.8: R15.1@82.9,73.883 R2.2@82.9,74.93
sda: J2.02 R1.2 R16.1 U1.18 | length 24.6
  Top Layer w0.254: R1.2 84.654,75.445 85.351,75.445 86.36,76.454 86.36,77.597 87.103,78.34 88.63,78.34 90.33,80.04 90.588,80.04 93.139,82.591 93.639,82.591 93.892,82.338 93.892,81.592 U1.18
  Top Layer w0.8: R1.2 R16.1 85.152,73.852 v1(85.344,73.66)
  Bottom Layer w0.254: J2.02@77.795,72.207 79.375,73.787 82.222,73.787 82.349,73.66 v1(85.344,73.66)
sdi_12: J2.08 U1.9 | length 17.4
  Top Layer w0.254: v1(86.233,86.487) 86.233,86.614 86.618,86.999 U1.9
  Bottom Layer w0.254: J2.08 79.121,81.153 82.55,81.153 86.233,84.836 v1(86.233,86.487)
sdi_34: J2.09 R5.2 U1.8 | length 13.2
  Top Layer w0.254: J2.09@80.58,82.55 R5.2 83.955,85.925 83.955,86.368 85.086,87.499 U1.8
sdi_56: J2.10 R4.2 U1.7 | length 17.8
  Top Layer w0.254: J2.10@77.887,82.459 79.248,83.82 81.026,83.82 82.423,85.217 82.423,86.106 84.582,88.265 84.582,88.708 ; R4.2 84.582,88.708 ; U1.7 85.291,87.999 84.582,88.708
sdi_78: J2.11 R3.2 U1.6 | length 14.4
  Top Layer w0.254: R3.2 86.198,88.997 86.198,88.638 86.347,88.489 88.882,88.489 88.892,88.499 U1.6 ; R3.2@86.019,89.216 86.416,89.614 v1(86.472,89.614)
  Bottom Layer w0.254: J2.11@80.645,85.09 80.645,85.217 85.042,89.614 v1(86.472,89.614)
sdo_12: J2.17 U1.57 | length 21.2
  Top Layer w0.254: J2.17 84.236,96.428 93.612,96.428 93.615,96.431 94.593,96.431 94.596,96.428 96.447,96.428 96.905,95.97 U1.57
sdo_34: J2.16 U1.58 | length 24.3
  Top Layer w0.254: J2.16 79.134,91.326 81.039,91.326 81.842,92.129 81.842,93.025 84.775,95.958 85.289,95.958 93.8,95.974 93.803,95.977 94.405,95.977 94.408,95.974 96.256,95.974 96.405,95.825 U1.58
sdo_56: J2.15 U1.62 | length 18.4
  Top Layer w0.254: J2.15 80.772,90.17 82.296,91.694 82.296,92.837 84.963,95.504 92.775,95.504 94.392,93.887 94.392,92.932 U1.62
sdo_78: J2.14 U1.63 | length 21.5
  Top Layer w0.254: J2.14 79.148,88.8 81.053,88.8 82.75,90.497 82.75,92.543 85.203,94.996 92.641,94.996 93.892,93.745 93.892,92.932 U1.63
vdda: C17.2 FR2.2 U1.24 | length 13.2
  Top Layer w0.254: U1.24 96.905,79.862 96.458,79.415 C17.2 97.19,78.643 100.427,78.643 FR2.2@105.035,74.035
xti: R17.2 R18.2 R19.2 R20.2 U1.20 | length 8.7
  Top Layer w0.254: U1.20 94.892,81.566 94.892,80.44 94.57,80.118 94.57,80.092 94.265,79.787 94.265,78.836 94.464,78.637 94.783,78.637 R17.2
  Top Layer w0.8: R17.2 R20.2 R19.2 R18.2
xti_1: J2.01 R17.1 | length 18.4
  Top Layer w0.254: v1(94.445,77.856) 94.55,77.751 94.55,77.47 R17.1
  Bottom Layer w0.254: J2.01 80.648,72.52 89.792,72.52 94.316,77.044 94.445,77.173 v1(94.445,77.856)
pads on no net: U1.5 U1.14 U1.22 U1.26 U1.37 U1.46 U1.54 U1.61

## Polygon pours and split planes (outlines as drawn)
gnd on Bottom Layer "GND_L02_P000" (solid, pour order 0): 81.788,69.723 81.788,98.171 113.157,98.171 113.157,69.723

## Keep-outs
Keep-Out Layer:
  lines w0.254: 76.2,69.596 118.745,69.596 118.745,98.298 76.2,98.298 76.2,69.596

## Text inside footprints (layer, text, board x,y; h text height)
U2: Top Overlay "*" at 90.678,74.295 h0.9